# Altium PCB RFID_CC1101_433MHz.PcbDoc
Units mil, origin at the board's own origin, x right, y up, seen from the top; angles counter-clockwise.
Board outline 1889.76 x 2125.98 mil, 4 copper layers (Top Layer, GND Plane, POWER Plane, Bottom Layer), stack 16.312 mil thick; 74 components, 57 nets, 259 pads, 203 vias.
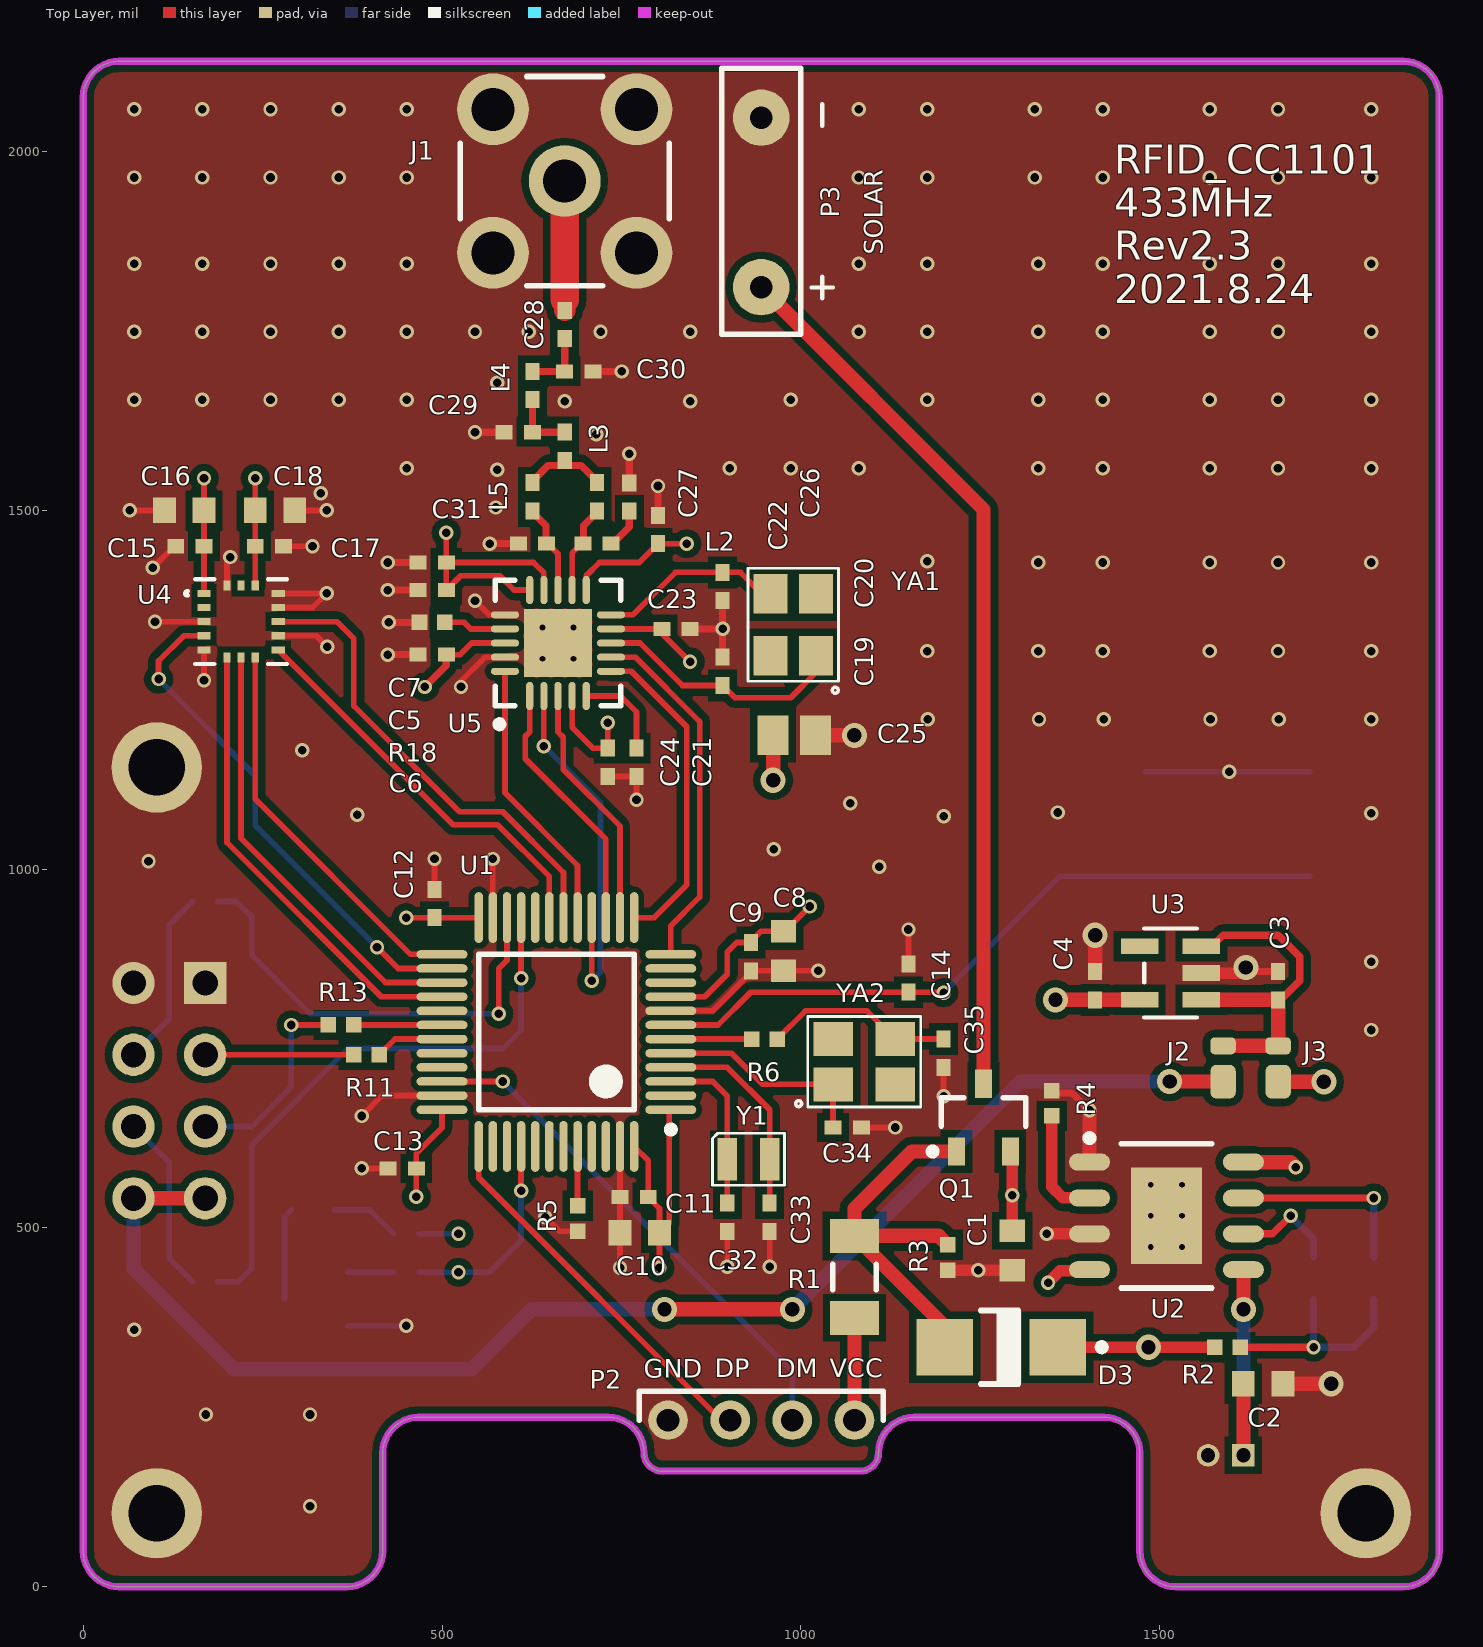
[diagram p0: Top Layer view]
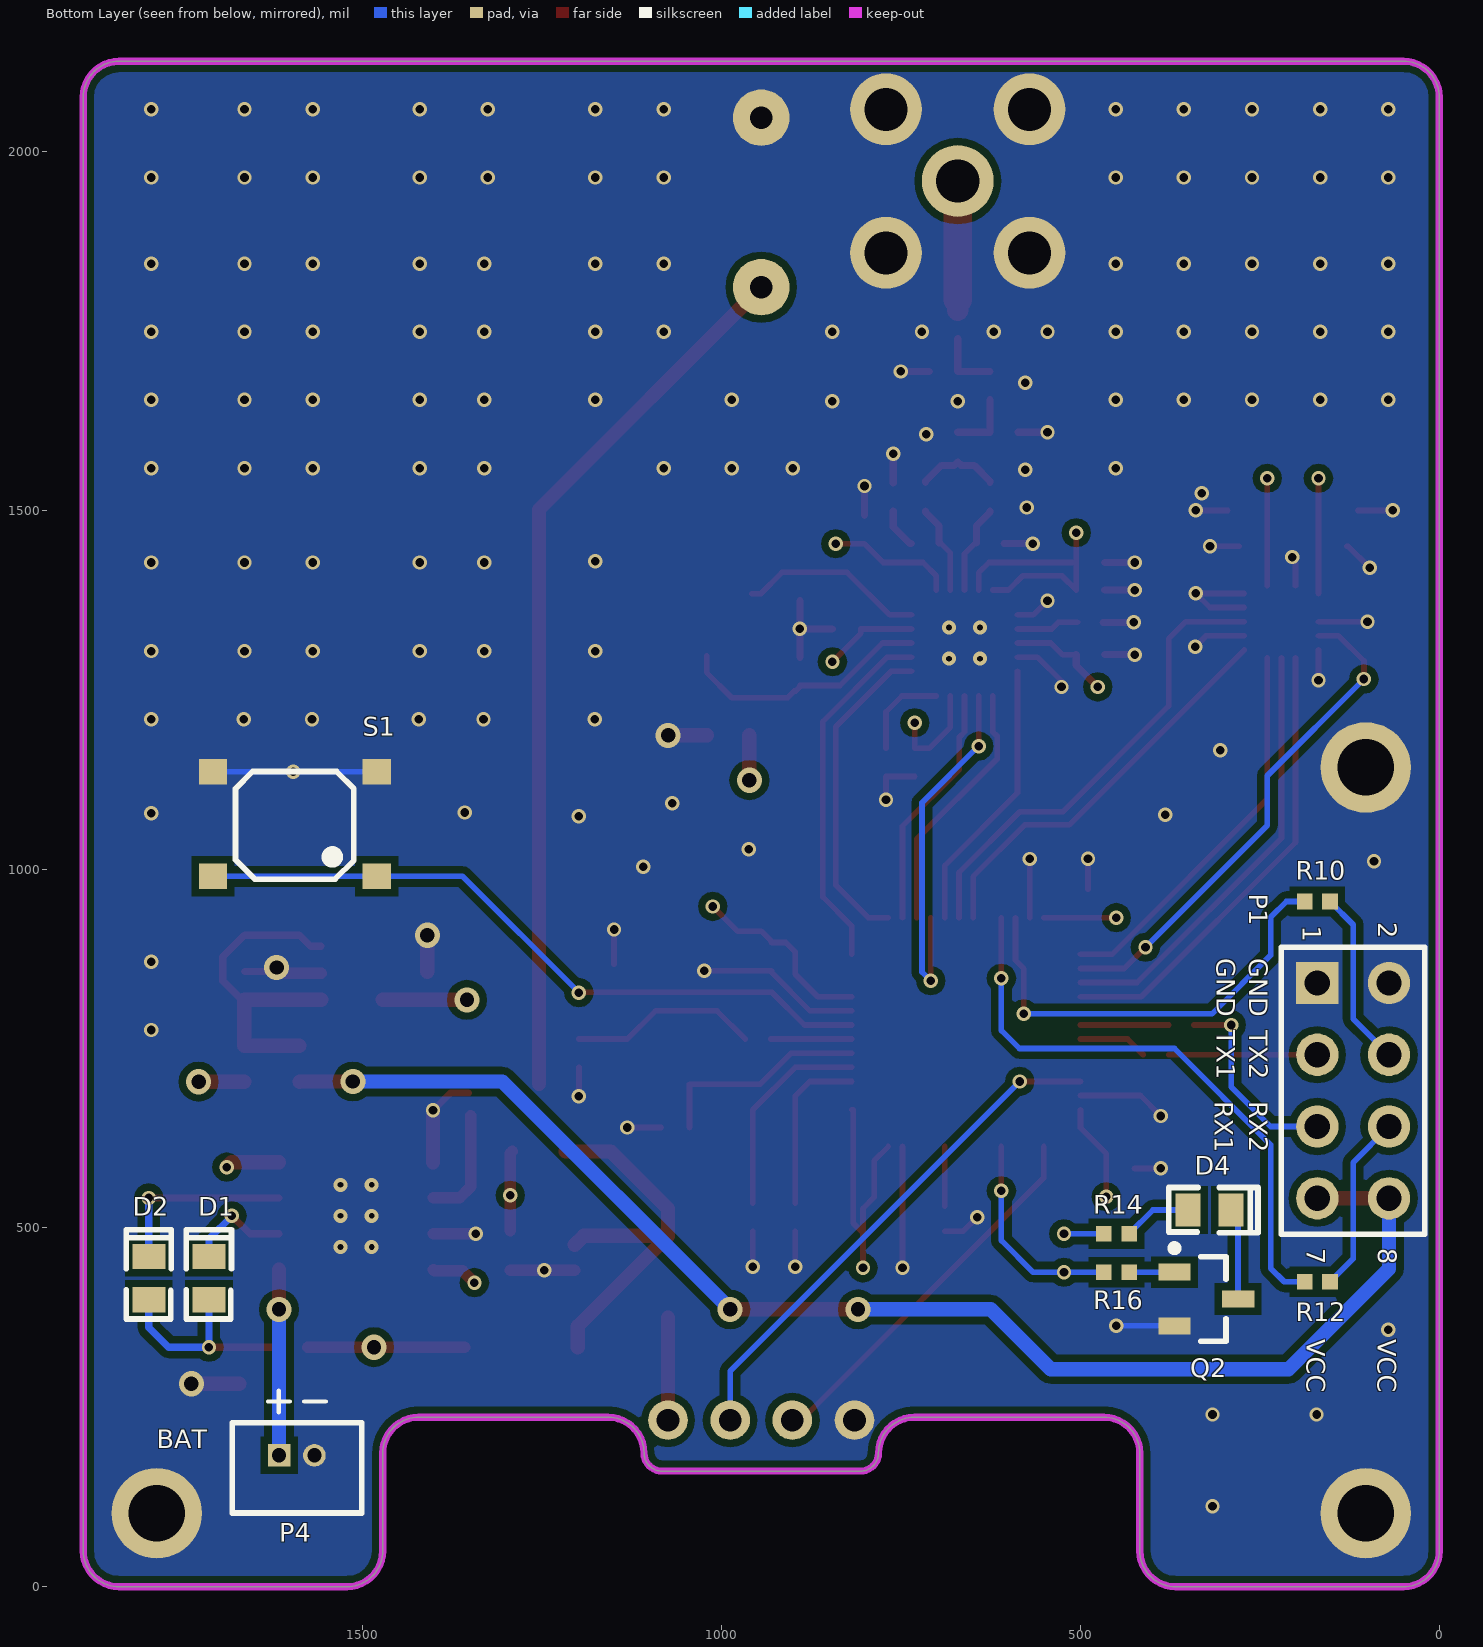
[diagram p1: Bottom Layer view, seen from below]
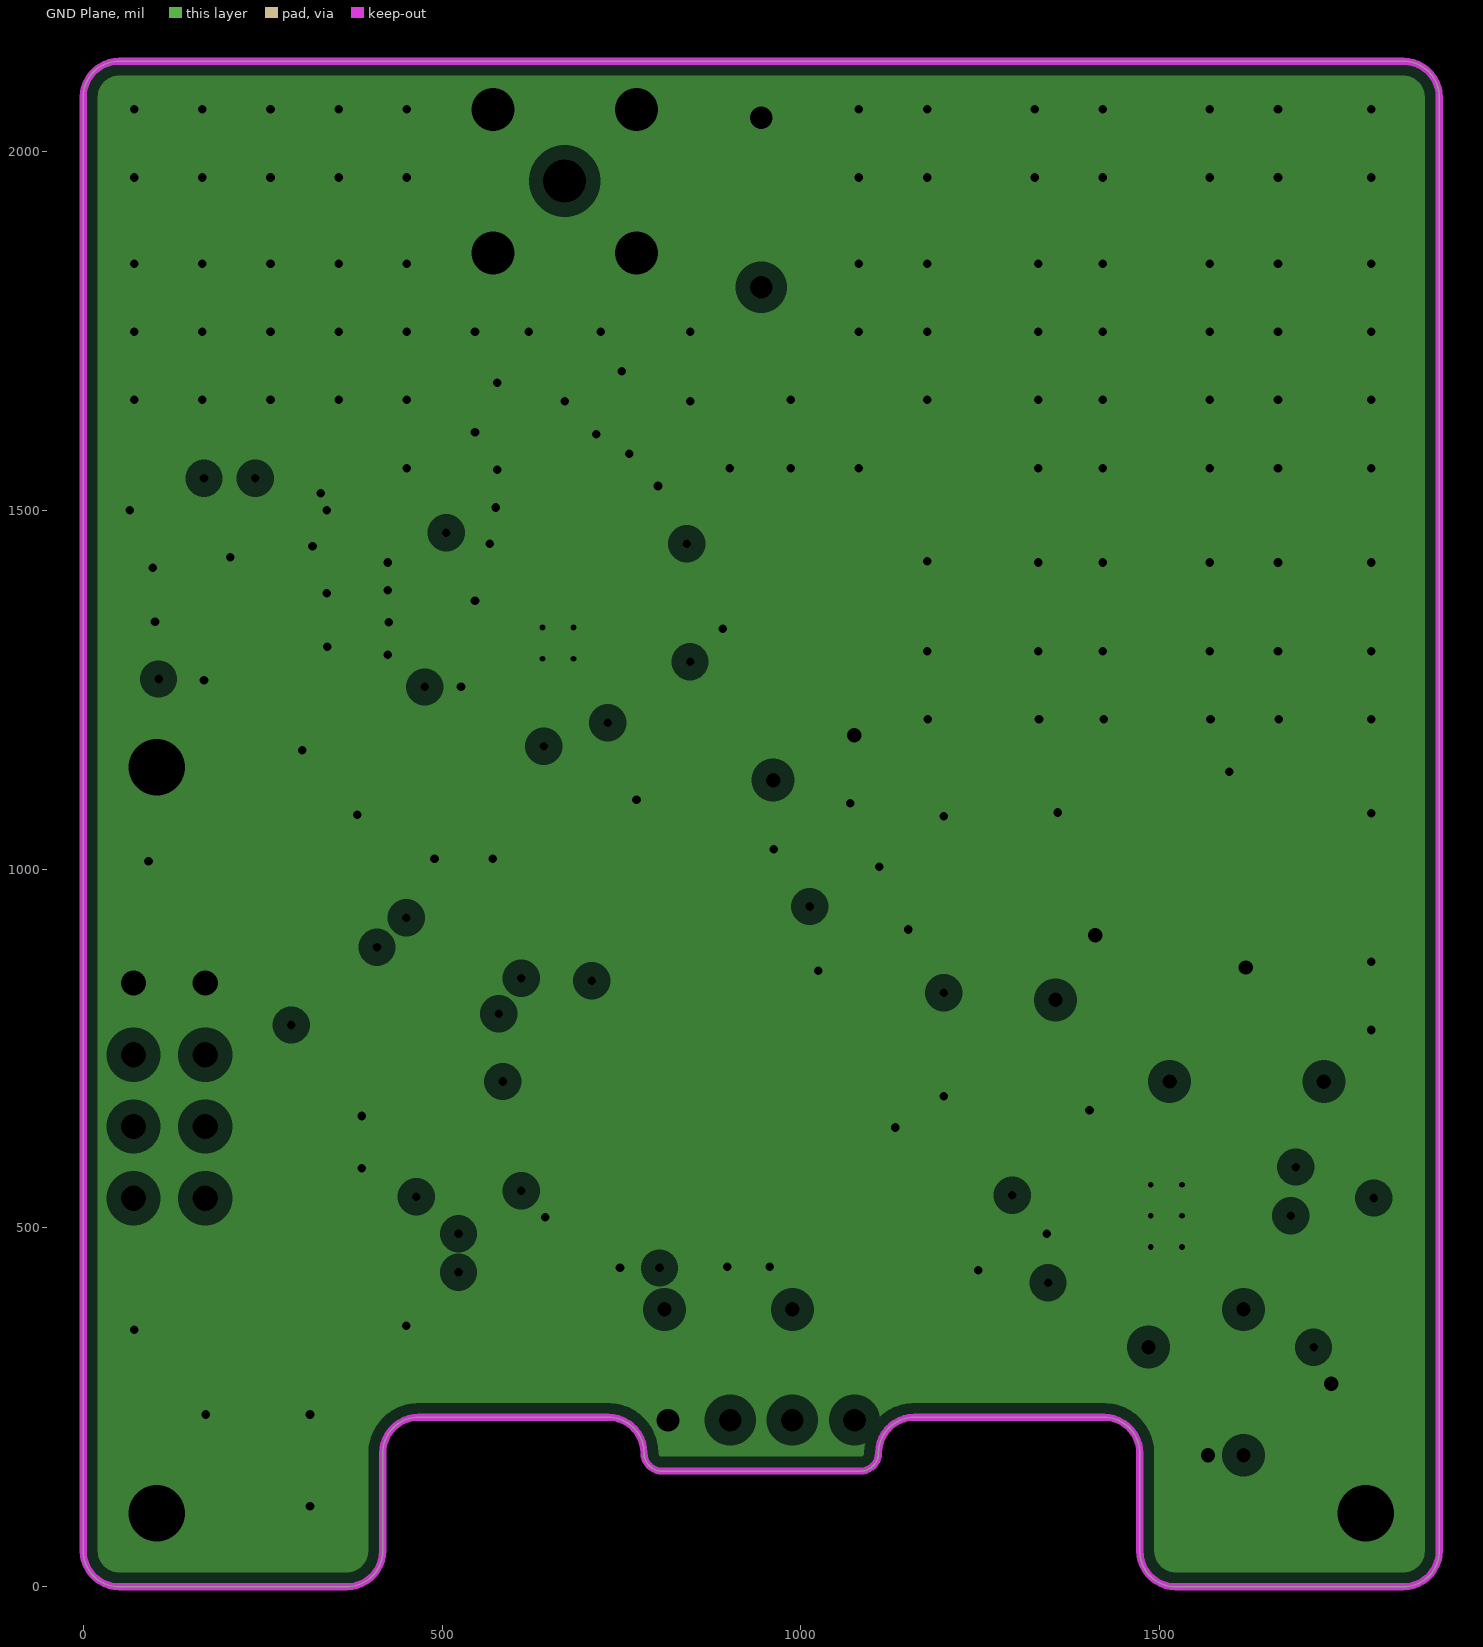
[diagram p2: GND Plane, clearances drawn from the general rule]
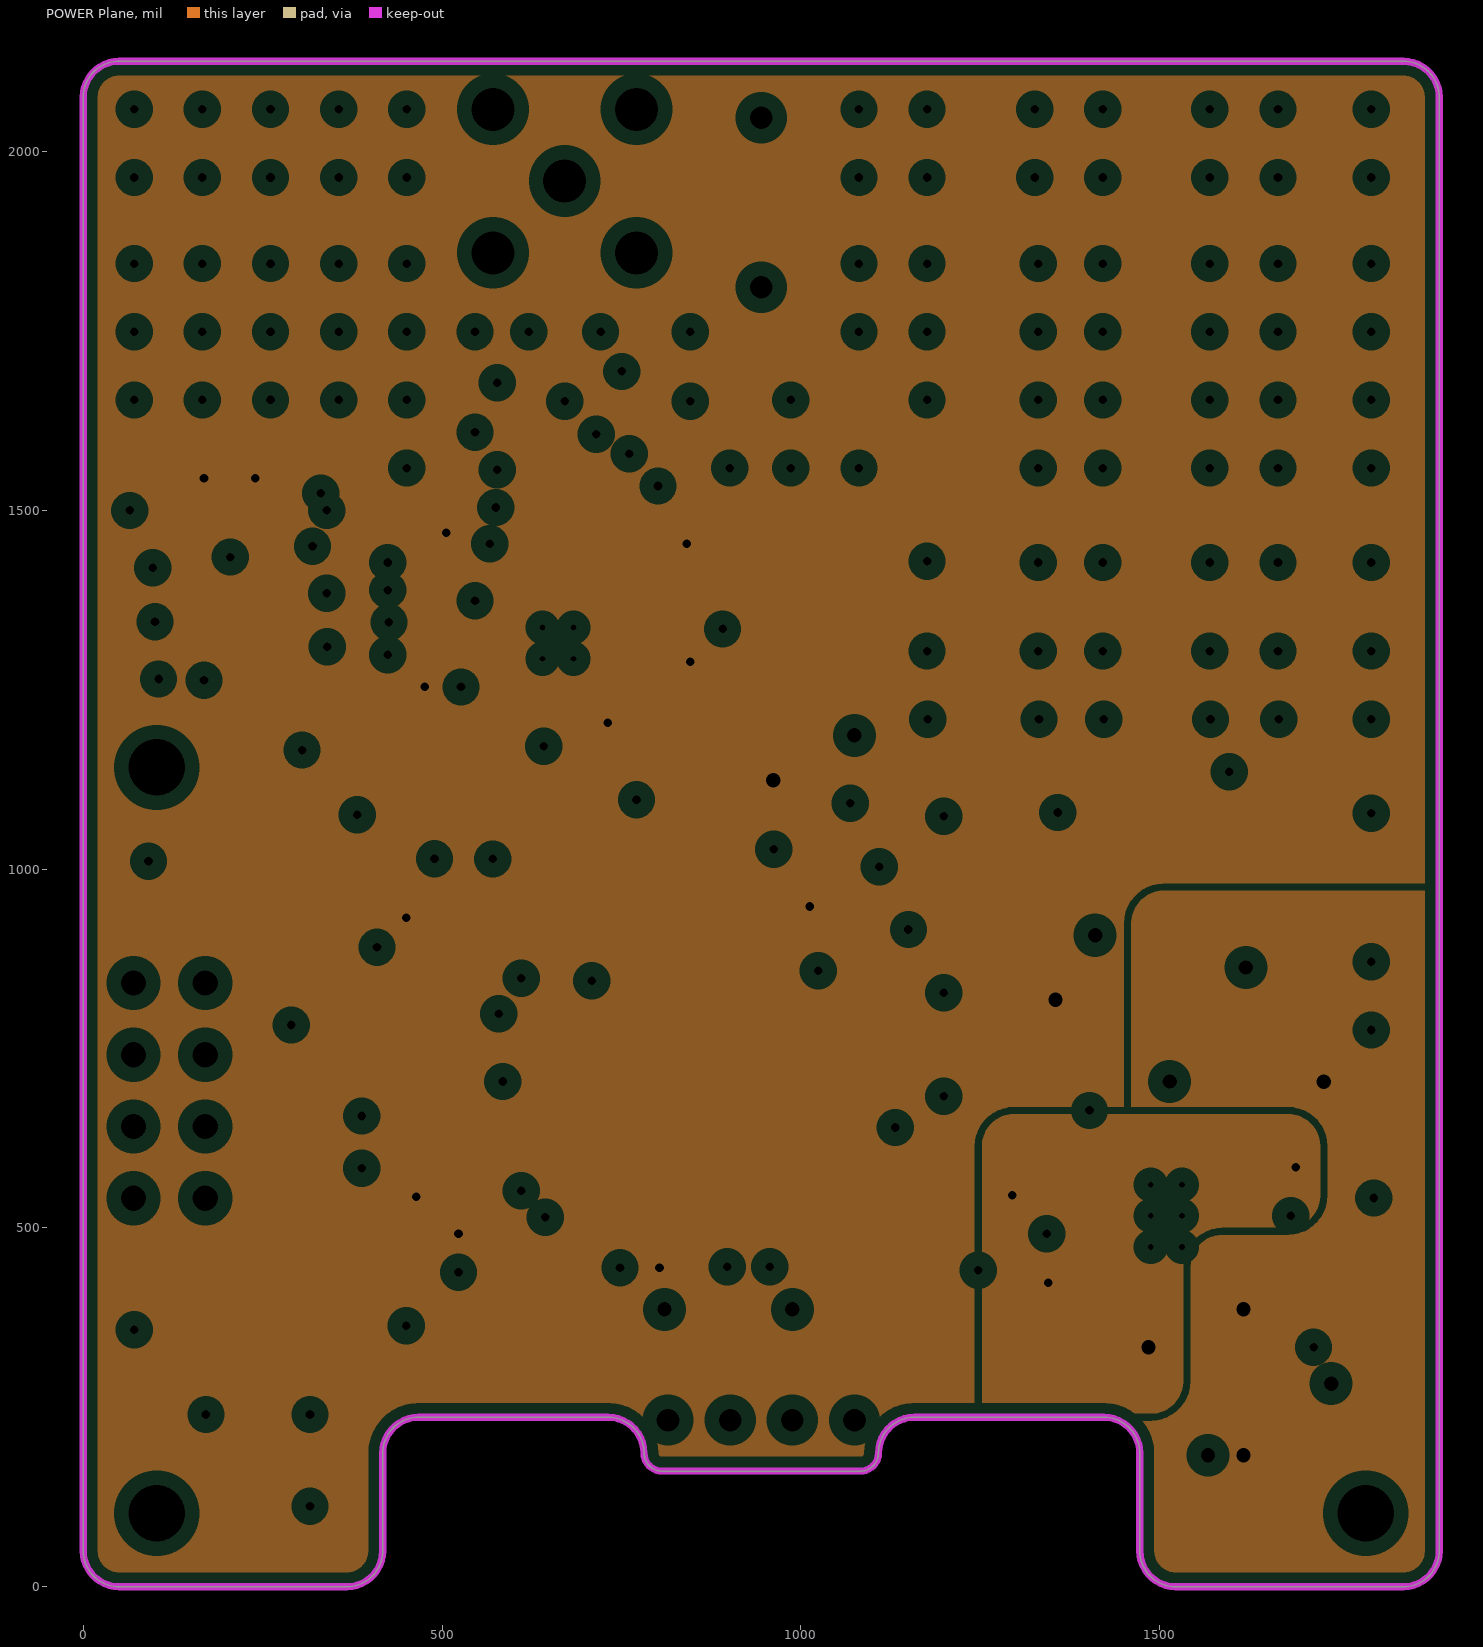
[diagram p3: POWER Plane, clearances drawn from the general rule]

## Layer stack, top to bottom
Top Solder: solder mask 0.4, Solder Resist, Dk 3.5
Top Layer: signal copper 1.3779
Dielectric 1: core 4, Core-009, Dk 4.5
GND Plane: plane copper 1.3779, net GND
Dielectric 3: prepreg 2.8, PP-006, Dk 4.1
POWER Plane: plane copper 1.3779, net (Multiple Nets)
Dielectric 2: core 4, Core-009, Dk 4.5
Bottom Layer: signal copper 1.3779
Bottom Solder: solder mask 0.4, Solder Resist, Dk 3.5

## Board outline
0,50 ccw(c50,50) 50,0 367.32,0 ccw(c367.32,50) 417.32,50 417.32,186.22 cw(c467.32,186.22) 467.32,236.22 731.5,236.22 cw(c731.5,186.22) 781.5,186.22 ccw(c806.5,186.22) 806.5,161.22 1083.27,161.22 ccw(c1083.27,186.22) 1108.27,186.22 cw(c1158.27,186.22) 1158.27,236.22 1422.44,236.22 cw(c1422.44,186.22) 1472.44,186.22 1472.44,50 ccw(c1522.44,50) 1522.44,0 1839.76,0 ccw(c1839.76,50) 1889.76,50 1889.76,2075.87 ccw(c1839.88,2075.98) 1840,2125.87 1840,2125.98 50,2125.98 ccw(c50,2075.98) 0,2075.98

## Design rules (kind name [scope] priority, off if disabled: settings)
Clearance Clearance_8mil [(IsPad and InComponent('U1')) or (IsPad and InComponent('U4')) or (IsPad and InComponent('U5')) or (IsPad and InComponent('USB1'))] p1: gap=8 ignorepadtopadclearanceinfootprint=TRUE
Clearance [All] p2: gap=10 ignorepadtopadclearanceinfootprint=FALSE except(0: Arc-Hole Track-Hole SMDPad-Hole THPad-Hole Via-Hole Fill-Hole Poly-Hole Region-Hole Text-Hole)
MinimumSolderMaskSliver [All] p1: minsoldermaskwidth=1.4
PlaneClearance [All] p1: clearance=20
PlaneConnect [All] p1: planeconnectstyle=Direct reliefexpansion=20 reliefentries=4 reliefconductorwidth=10 reliefairgap=10
PolygonConnect [All] p1: connectstyle=Direct reliefconductorwidth=10 reliefentries=4 polygonreliefangle="90 Angle" airgapwidth=10
RoutingVias [All] p1: holewidth=12 width=20 viastyle="Through Hole" minholewidth=6 minwidth=16 maxholewidth=28 maxwidth=50
SilkToSilkClearance [All] p1: silktosilkclearance=6
SilkToSolderMaskClearance [IsPad] p1: minsilkscreentomaskgap=0 clearancetoexposedcopper=TRUE
SolderMaskExpansion [All] p1: expansion=4
Width Width_PW [InNet('BAT+') or InNet('SOLAR+') or InNet('VCC') or InNet('VCC_3V') or InNet('VCC_5V')] p1: maxlimit=40 minlimit=8 preferedwidth=20
Width [All] p2: maxlimit=40 minlimit=8 preferedwidth=10
25 further rules are at their usual default settings.

## Classes and differential pairs
component class Power: C1 C2 C3 C4 D1 D2 D3 J2 J3 P3 P4 Q1 R1 R2 R3 R4 U2 U3
component class MEMS&RF: C5 C6 C7 C15 C16 C17 C18 C19 C20 C21 C22 C23 C24 C25 C26 C27 C28 C29 C30 C31 J1 L2 L3 L4 L5 R18 U4 U5 YA1
component class MCU: C8 C9 C10 C11 C12 C13 C14 C32 C33 D4 P1 Q2 R5 R10 R11 R12 R13 R14 R16 S1 U1 Y1

## Components (designator, comment, footprint, x,y, rotation, side; value= is the part's Value field where it differs from the comment)
C1 "10uF" 1608[0603] 1294.58,468.73 r90 top
C2 "10uF" 1608[0603] 1644.43,283 r180 top
C3 "1uF" 0402 1665.24,837.61 r270 top
C4 "1uF" 0402 1410.24,837.61 r270 top
C5 "220pF" 0402 486.32,1389 r180 top
C6 "220pF" 0402 486.31,1299 r0 top
C7 "10nF" 0402 486.31,1427.44 r0 top
C8 "1uF" 1608[0603] 975.85,885.94 r90 top
C9 "100nF" 0402 930.63,878.06 r90 top
C10 "10uF" 1608[0603] 775.59,493.06 r0 top
C11 "100nF" 0402 767.72,543.06 r180 top
C12 "100nF" 0402 489.45,952.2 r90 top
C13 "100nF" 0402 444.45,583.06 r180 top
C14 "100nF" 0402 1150,848.31 r90 top
C15 "100nF" 0402 148.64,1450 r0 top
C16 "1uF" 1608[0603] 140.77,1500 r180 top
C17 "100nF" 0402 259.38,1450 r0 top
C18 "1uF" 1608[0603] 267.25,1500 r180 top
C19 "12pF" 0402 891,1275.81 r270 top
C20 "15pF" 0402 891,1394 r90 top
C21 "100nF" 0402 771,1149 r90 top
C22 "220pF" 0402 801,1473.37 r90 top
C23 "10nF" 0402 826,1334.87 r180 top
C24 "100nF" 0402 731,1149 r270 top
C25 "1uF" C0805 990.98,1186.56 r180 top
C26 "220pF" 0402 761,1518.68 r90 top
C27 "3.9pF" 0402 716,1519 r90 top
C28 "220pF" 0402 671,1759 r90 top
C29 "8.2pF" 0402 606.31,1609 r0 top
C30 "5.6pF" 0402 690.68,1693.69 r180 top
C31 "3.9pF" 0402 626,1453.68 r0 top
C32 "10pF" 0402 897.59,514.99 r90 top
C33 "10pF" 0402 956.64,514.99 r90 top
C34 "18pF" 0402 1064.69,640 r180 top
C35 "18pF" 0402 1199,743.54 r90 top
D1 "Green" 0603/K 1714.58,400 r90 bottom
D2 "Red" 0603/K 1798.45,400 r90 bottom
D3 "SS24S" ONSC-SMA-2-403D-02_V 1279.58,333.85 r180 top
D4 "Green" 0603/K 350,525 r180 bottom
J1 "CONSMA002" CON-SMA-RA 671,1959 r0 top
J2 "0Ω" "1608[0603] - JUMPER" 1588.43,723.85 r90 top
J3 "0Ω" "1608[0603] - JUMPER" 1665.24,723.85 r90 top
L2 "27nH" 0402 716,1453.69 r0 top
L3 "22nH" 0402 671,1589.32 r90 top
L4 "27nH" 0402 626,1674 r90 top
L5 "27nH" 0402 626,1519 r90 top
P1 "15446808" HDR2X4-15446808 170,841.41 r270 bottom
P2 "LBX0062A" LBX0062A 1074.8,232.28 r180 top
P3 "SOLAR-PAD" SOLAR-PAD 944.88,1811.02 r90 top
P4 "A1251WV-XP-2P" A1251WV-XP-2P 1616.87,183.22 r180 bottom
Q1 "Si2301CDS" SOT95P237X112-3N 1254.58,653.85 r90 top
Q2 "MMS8050-L" SOT-23B_N 324.69,401 r180 bottom
R1 "0.4" RESC3216X07N 1074.8,431.85 r90 top
R2 "1k" RESC1005X04N 1594.58,333.85 r0 top
R3 "10k" RESC1005X04N 1204.58,458.89 r90 top
R4 "1.2k" RESC1005X04N 1349.58,673.85 r270 top
R5 "10k" RESC1005X04N 688.98,513.06 r270 top
R6 "390" RESC1005X04N 949.33,763.22 r180 top
R10 "33" RESC1005X04N 170,955 r180 bottom
R11 "33" RESC1005X04N 394.88,741.41 r180 top
R12 "33" RESC1005X04N 170,425 r180 bottom
R13 "33" RESC1005X04N 359.45,782.91 r0 top
R14 "10k" RESC1005X04N 450,491.85 r0 bottom
R16 "1k" RESC1005X04N 450,438.4 r180 bottom
R18 "56k" RESC1005X04N 486.31,1344 r0 top
S1 "DPST-4" DPST 1480.65,990.16 r0 bottom
U1 "STM32L051C8T6" STM-LQFP48_N 659.45,773.06 r180 top
U2 "TP4056" ESOP-9N 1509.58,516.85 r0 top
U3 "ADP151AUJZ-3.0-R7" UJ_5 1515.24,855.32 r180 top
U4 "ADXL362BCCZ" LGA_CC-16-4 220,1345 r0 top
U5 "CC1101" QFN50P400X400X100_HS-21N 661.63,1315.18 r90 top
Y1 "32.768k" XTAL-2012 897.59,595.81 r0 top
YA1 "26MHz" XTAL-SMT-4P 1021,1297.39 r90 top
YA2 "8M" XTAL-SMT-4P 1045,700.23 r0 top

## Footprints (in the part's own frame and the unit in brackets; to place one, negate y for a bottom-side part, rotate by r counter-clockwise, add the part's x,y. Pads: shape width x height; smd on the part's side, far side on the other; paste and mask are expansions set on the pad)
0402 [mm] "Chip Capacitor, Body 1.0x0.5mm, IPC High Density"
  rect 0.6x0.5 smd: 1(-0.5,0) 2(0.5,0)
  body extent -0.55,-0.3 0.55,0.3, height 1.3
0603/K [mil]
  rect 35x46 smd: A(0,0) K(60,0)
  silkscreen extent -27,-31 97,31
1608[0603] [mm] "Chip Capacitor, Body 1.6x0.8mm, IPC High Density"
  rect 0.8x0.9 smd: 1(-0.7,0) 2(0.7,0)
  body extent -0.87,-0.48 0.87,0.48, height 1.3
"1608[0603] - JUMPER" [mm] "jumper, Body 1.6x0.8mm, IPC High Density"
  rrect50% 1.2x0.9 smd: 1(-0.508,0)
  rrect50% 0.6x0.9 smd: 2(0.762,0)
  body extent -0.87,-0.48 0.87,0.48, height 1.3
A1251WV-XP-2P [mm] "Connector; Header; 2 Position"
  rect 0.8x0.8 hole 0.5: 1(0,0)
  round 0.8 hole 0.5: 2(1.25,0)
  silkscreen extent -1.66,-2.05 2.93,2.29
C0805 [mm] "Chip Capacitor, Body 2.0x1.3mm, IPC High Density"
  rect 1.1x1.4 smd: 1(-0.75,0) 2(0.75,0)
  body extent -1.1,-0.72 1.1,0.72, height 1.4
CON-SMA-RA [mil] "Connector, SMA Female, 5-Lead, Thru-Hole, Right-Angle, Body 7x7mm"
  round 100 hole 60: 1(0,0) 2(-100,100) 3(100,100) 4(100,-100) 5(-100,-100)
  silkscreen extent -146,-146 146,146
DPST [mm]
  rect 1x0.9 smd: 1(0,0) 2(5.8,0) 3(0,-3.7) 4(5.8,-3.7)
  silkscreen extent 0.81,-3.71 5,0.1
ESOP-9N [mm] "ESOP, 8-Leads, Body 4.90x3.90mm, Pitch 1.27mm, Thermal Pad 3.41x2.52mm, IPC Medium Density, For TP4056"
  oval 1.45x0.6 smd: 1(-2.725,1.905) 2(-2.725,0.635) 3(-2.725,-0.635) 4(-2.725,-1.905) 5(2.725,-1.905) 6(2.725,-0.635) 7(2.725,0.635) 8(2.725,1.905)
  rect 2.52x3.41 smd: 9(0,0)
  silkscreen extent -2.85,-2.55 1.6,2.88, body extent -3,-2.55 3,2.55, height 1.75
HDR2X4-15446808 [mm] "Connector; Header; 4x2 Position"
  rect 1.5x1.5 hole 0.9: 1(0,0)
  round 1.5 hole 0.9: 2(0,2.54) 3(2.54,0) 4(2.54,2.54) 5(5.08,0) 6(5.08,2.54) 7(7.62,0) 8(7.62,2.54)
  silkscreen extent -1.27,-1.27 8.89,3.81
LBX0062A [mm] "PogoPin; Connector; 4 Position"
  round 1.4 hole 0.8: 1(0,0) 2(2.2,0) 3(4.4,0) 4(6.6,0)
  silkscreen extent -1.02,-1.02 7.62,0
LGA_CC-16-4 [mm]
  rect 0.475x0.25 smd: 1(-1.313,1) 2(-1.313,0.5) 3(-1.313,0) 4(-1.313,-0.5) 5(-1.313,-1) 9(1.313,-1) 10(1.313,-0.5) 11(1.313,0) 12(1.313,0.5) 13(1.313,1)
  rect 0.25x0.35 smd: 6(-0.5,-1.275) 7(0,-1.275) 8(0.5,-1.275) 14(0.5,1.275) 15(0,1.275) 16(-0.5,1.275)
  silkscreen extent -1.98,-1.5 1.63,1.5, body extent 0,0 0.25,0.25, height 0.25
ONSC-SMA-2-403D-02_V [mm] "Molded, 2-Leads, Body 4.57x2.92mm"
  rect 2x2 smd: 1(-2,0) 2(2,0)
  silkscreen extent -3.67,-1.3 0.74,1.3, body extent -2.16,-1.3 2.16,1.3, height 2.2
QFN50P400X400X100_HS-21N [mm] "QFN, 20-Leads, Body 4.00x4.00mm, Pitch 0.50mm, Thermal Pad 2.40x2.40mm, IPC Medium Density"
  oval 1x0.25 smd: 1(-1.875,1) 2(-1.875,0.5) 3(-1.875,0) 4(-1.875,-0.5) 5(-1.875,-1) 11(1.875,-1) 12(1.875,-0.5) 13(1.875,0) 14(1.875,0.5) 15(1.875,1)
  oval 0.25x1 smd: 6(-1,-1.875) 7(-0.5,-1.875) 8(0,-1.875) 9(0.5,-1.875) 10(1,-1.875) 16(1,1.875) 17(0.5,1.875) 18(0,1.875) 19(-0.5,1.875) 20(-1,1.875)
  rect 2.4x2.4 smd: 21(0,0)
  silkscreen extent -3,-2.22 2.22,2.22, body extent -2.08,-2.08 2.08,2.08, height 1
RESC1005X04N [mm] "Chip Resistor, 2-Leads, Body 1.00x0.50mm, IPC Medium Density"
  rect 0.55x0.55 smd: 1(-0.45,0) 2(0.45,0)
  body extent -0.53,-0.28 0.53,0.28, height 0.4
RESC3216X07N [mm] "Chip Resistor, 2-Leads, Body 3.20x1.60mm, IPC Medium Density"
  rect 1.2x1.75 smd: 1(-1.45,0) 2(1.45,0)
  silkscreen extent -0.45,-0.77 0.45,0.77, body extent -1.7,-0.87 1.7,0.87, height 0.65
SOLAR-PAD [mm] "Connector; Header; 2 Position"
  round 2 hole 0.8: 1(0,0) 2(6,0)
  silkscreen extent -1.66,-2.54 7.75,1.4
SOT95P237X112-3N [mm] "SOT23, 3-Leads, Body 2.92x2.37mm, Pitch 0.95mm, IPC Medium Density"
  rect 1x0.6 smd: 1(-1.2,0.95) 2(-1.2,-0.95) 3(1.2,0)
  silkscreen extent -1.32,-1.5 0.7,1.92, body extent -1.32,-1.52 1.32,1.52, height 1.12
SOT-23B_N [mm] "SOT23, 3-Leads, Body 2.9x1.3mm, Pitch 0.95mm, Lead Span 2.4mm, IPC Medium Density"
  rect 1.15x0.6 smd: B(-1.125,0.95) C(1.125,0) E(-1.125,-0.95)
  silkscreen extent -1.25,-1.5 0.7,1.92, body extent -0.7,-1.5 0.7,1.5, height 1.14
STM-LQFP48_N [mm] "QFP, 48-Leads, Body 7x7mm, Pitch 0.5mm, IPC Medium Density"
  oval 1.8x0.3 smd: 1(-4.05,2.75) 2(-4.05,2.25) 3(-4.05,1.75) 4(-4.05,1.25) 5(-4.05,0.75) 6(-4.05,0.25) 7(-4.05,-0.25) 8(-4.05,-0.75) 9(-4.05,-1.25) 10(-4.05,-1.75) 11(-4.05,-2.25) 12(-4.05,-2.75) 25(4.05,-2.75) 26(4.05,-2.25) 27(4.05,-1.75) 28(4.05,-1.25) 29(4.05,-0.75) 30(4.05,-0.25) 31(4.05,0.25) 32(4.05,0.75) 33(4.05,1.25) 34(4.05,1.75) 35(4.05,2.25) 36(4.05,2.75)
  oval 0.3x1.8 smd: 13(-2.75,-4.05) 14(-2.25,-4.05) 15(-1.75,-4.05) 16(-1.25,-4.05) 17(-0.75,-4.05) 18(-0.25,-4.05) 19(0.25,-4.05) 20(0.75,-4.05) 21(1.25,-4.05) 22(1.75,-4.05) 23(2.25,-4.05) 24(2.75,-4.05) 37(2.75,4.05) 38(2.25,4.05) 39(1.75,4.05) 40(1.25,4.05) 41(0.75,4.05) 42(0.25,4.05) 43(-0.25,4.05) 44(-0.75,4.05) 45(-1.25,4.05) 46(-1.75,4.05) 47(-2.25,4.05) 48(-2.75,4.05)
  silkscreen extent -4.18,-2.75 2.75,3.57, body extent -3.5,-3.5 3.5,3.5, height 1.6
UJ_5 [mil] "5P,TSOT for ADP151AUJZ"
  rect 52x22 smd paste+0 mask+0: 1(-43,37.4) 2(-43,0) 3(-43,-37.4) 4(43,-37.4) 5(43,37.4)
  silkscreen extent -37,-62 37,62, body extent -55,-57 55,57, height 39
XTAL-2012 [mm] "NX2012SA, 2 pins, 2.0mmx1.2mm."
  rect 0.7x1.5 smd: 1(0,0) 2(1.5,0)
  silkscreen extent -0.53,-0.92 2.03,0.92
XTAL-SMT-4P [mm] "3225, 3.2mmx2.5mm"
  rect 1.4x1.2 smd: 1(0,0) 2(2.2,0) 3(2.2,1.6) 4(0,1.6)
  silkscreen extent -1.32,-0.8 3.1,2.4

## Part data
C1 C2 C10: library part C1608X5R1A106K080AC, "Capacitor (0603,X5R,10uF,DC 10V,±10%) TDK", LatestRevisionDate=29-May-2009, LatestRevisionNote="IPC-7351 Footprint Added.", PackageDescription="Chip Capacitor", PackageReference=C0603, Published=8-Jun-2000, Publisher="Altium Limited"
C3 C4: library part C1005X5R1E105K050BC, "Capacitor (0402,X5R,1uF,DC 25V,±10%) TDK", LatestRevisionDate=29-May-2009, LatestRevisionNote="IPC-7351 Footprint Added.", PackageDescription="Chip Capacitor", PackageReference=C0402, Published=8-Jun-2000, Publisher="Altium Limited"
C5 C6 C22 C26 C28: library part GRM1555C1H221JA01D, "Capacitor (0402,NP0,220pF,DC 50V,±5%) Murata", LatestRevisionDate=29-May-2009, LatestRevisionNote="IPC-7351 Footprint Added.", PackageDescription="Chip Capacitor", PackageReference=C0402, Published=8-Jun-2000, Publisher="Altium Limited"
C7 C23: library part GRM155R71E103KA01D, "Capacitor (0402,X7R,10nF,DC 25V,±10%) Murata", LatestRevisionDate=29-May-2009, LatestRevisionNote="IPC-7351 Footprint Added.", PackageDescription="Chip Capacitor", PackageReference=C0402, Published=8-Jun-2000, Publisher="Altium Limited"
C8 C16 C18: library part CGA3E2X5R1A105K080AA, "Capacitor (0603,X5R,1uF,DC 10V,+/-10%) TDK", LatestRevisionDate=29-May-2009, LatestRevisionNote="IPC-7351 Footprint Added.", PackageDescription="Chip Capacitor", PackageReference=C0603, Published=8-Jun-2000, Publisher="Altium Limited"
C9 C11 C12 C13 C14: library part CGA2B2X5R1A104K050BA, "Capacitor (0402,X5R,100nF,DC 10V,±10%) TDK", LatestRevisionDate=29-May-2009, LatestRevisionNote="IPC-7351 Footprint Added.", PackageDescription="Chip Capacitor", PackageReference=C0402, Published=8-Jun-2000, Publisher="Altium Limited"
C15 C17: library part C1005X7R1H104K050BE, "Capacitor (0402,X7R,100nF,DC 50V,±10%) TDK", LatestRevisionDate=29-May-2009, LatestRevisionNote="IPC-7351 Footprint Added.", PackageDescription="Chip Capacitor", PackageReference=C0402, Published=8-Jun-2000, Publisher="Altium Limited"
C19: library part GRM1555C1H120JZ01D, "Capacitor (0402,NP0,12pF,DC 50V,±5%) Murata", LatestRevisionDate=29-May-2009, LatestRevisionNote="IPC-7351 Footprint Added.", PackageDescription="Chip Capacitor", PackageReference=C0402, Published=8-Jun-2000, Publisher="Altium Limited"
C20: library part GRM1555C1H150JZ01D, "Capacitor (0402,NP0,15pF,DC 50V,±5%) Murata", LatestRevisionDate=29-May-2009, LatestRevisionNote="IPC-7351 Footprint Added.", PackageDescription="Chip Capacitor", PackageReference=C0402, Published=8-Jun-2000, Publisher="Altium Limited"
C21 C24: library part GRM155R71A104KA01D, "Capacitor (0402,X5R,100nF,DC 10V,±10%) Murata", LatestRevisionDate=29-May-2009, LatestRevisionNote="IPC-7351 Footprint Added.", PackageDescription="Chip Capacitor", PackageReference=C0402, Published=8-Jun-2000, Publisher="Altium Limited"
C25: library part GRM21BR71C105KA01L, "Capacitor (0805,X7R,1uF,DC 16V,±10%) Murata", LatestRevisionDate=29-May-2009, LatestRevisionNote="IPC-7351 Footprint Added.", PackageDescription="Chip Capacitor", PackageReference=C0805, Published=8-Jun-2000, Publisher="Altium Limited"
C27 C31: library part GRM1555C1H3R9CZ01D, "Capacitor (0402,NP0,3.9pF,DC 50V,±0.25pF) Murata", LatestRevisionDate=29-May-2009, LatestRevisionNote="IPC-7351 Footprint Added.", PackageDescription="Chip Capacitor", PackageReference=C0402, Published=8-Jun-2000, Publisher="Altium Limited"
C29: library part GRM1555C1H8R2CZ01D, "Capacitor (0402,NP0,8.2pF,DC 50V,±0.25pF) Murata", LatestRevisionDate=29-May-2009, LatestRevisionNote="IPC-7351 Footprint Added.", PackageDescription="Chip Capacitor", PackageReference=C0402, Published=8-Jun-2000, Publisher="Altium Limited"
C30: library part GRM1555C1H5R6CZ01D, "Capacitor (0402,NP0,5.6pF,DC 50V,±0.25pF) Murata", LatestRevisionDate=29-May-2009, LatestRevisionNote="IPC-7351 Footprint Added.", PackageDescription="Chip Capacitor", PackageReference=C0402, Published=8-Jun-2000, Publisher="Altium Limited"
C32 C33: library part CC0402DRNPO8BN100, "Capacitor (0402,NPO,10pF,DC 25V,±0.5pF) YAGEO", LatestRevisionDate=29-May-2009, LatestRevisionNote="IPC-7351 Footprint Added.", PackageDescription="Chip Capacitor", PackageReference=C0402, Published=8-Jun-2000, Publisher="Altium Limited"
C34 C35: library part CC0402GRNPO8BN180, "Capacitor (0402,NPO,18pF,DC 25V,±2%) YAGEO", LatestRevisionDate=29-May-2009, LatestRevisionNote="IPC-7351 Footprint Added.", PackageDescription="Chip Capacitor", PackageReference=C0402, Published=8-Jun-2000, Publisher="Altium Limited"
D1 D4: library part TLMG1100-GS08, "Standard 0603 SMD LED, Green, 2.1V,-40 °C to +100 °C", LatestRevisionDate=17-Jul-2002, LatestRevisionNote="Re-released for DXP Platform.", PackageDescription="SM LED; 2 Flat Leads", PackageReference=0603, PackageVersion=Feb-2002, Published=8-Jun-2000, Publisher="Altium Limited", Valid=Green
D2: library part TLMS1100-GS08, "Standard 0603 SMD LED, Red, 2.1V,-40 °C to +100 °C", LatestRevisionDate=17-Jul-2002, LatestRevisionNote="Re-released for DXP Platform.", PackageDescription="SM LED; 2 Flat Leads", PackageReference=0603, PackageVersion=Feb-2002, Published=8-Jun-2000, Publisher="Altium Limited", Valid=Red
D3: "Schottky Power Rectifier, 2-Pin SMA, VRRM=40V , VF=0.517V at IF=2.0A , Pb-Free, Tape and Reel", Manufacturer="On Semiconductor", Supplier Part Number 1=SS16T3GOSTR-ND, ComponentLink1Description="Manufacturer URL", ComponentLink1URL=http://www.onsemi.com/, ComponentLink2Description=Datasheet, ComponentLink2URL=http://www.onsemi.cn/pub_link/Collateral/SS16-D.PDF, ComponentLink3Description="Package Specification", ComponentLink3URL=http://www.onsemi.com/pub_link/Collateral/403D-02.PDF, Configuration=Single, DatasheetVersion="Rev. 7", IFSM Max (A)=40, Mounting Technology="Surface Mount", PackageDescription="2-Pin Small Molded Package, J-Bend Lead, Body 2.605 x 4.315 mm", PackageReference=SMA-2-403D-02, PackageVersion="Rev. G, 07/2012", Packing="Tape and Reel", PartNumber=SS24S, RoHS=TRUE, Supplier 1=Digi-Key, Supplier 2=Digi-Key, Supplier 3=Digi-Key, Supplier 4=Farnell, Supplier 5=Farnell, Supplier 6=Newark, Supplier 7=Newark, Supplier 8=Mouser, Supplier Part Number 2=SS16T3GOSCT-ND, Supplier Part Number 3=SS16T3GOSDKR-ND, Supplier Part Number 4=2317421, Supplier Part Number 5=1900107, Supplier Part Number 6=98H0976, Supplier Part Number 7=10N9613, Supplier Part Number 8=863-SS16T3G
J1: "SMA Female Right Angle PCB Mount Connector", ComponentLink1Description="Manufacturer URL", ComponentLink1URL=http://www.linxtechnologies.com/, ComponentLink2Description=Datasheet, ComponentLink2URL=http://www.connectorcity.com/diagrams/SMA/CONSMA002.pdf, DatasheetVersion="rev1.2, Aug-2008", PackageDescription="SMA Female Right Angle, PCB Mount Connector, Thru-Hole, 7 x 7 mm Body", PackageReference=CON-SMA-RA, PackageVersion="rev1.2, Aug-2008"
J2 J3: library part JUMP-0603, "jumper 0603(1608)", PackageDescription="Chip Resistor, 2-Leads, Body 1.60x0.80mm, IPC Medium Density", PackageReference=0603
L2 L4 L5: library part LQG15HS27NJ02D, "Inductor, 27n, 0402, ±5% / Murata", LatestRevisionDate=29-May-2009, LatestRevisionNote="IPC-7351 Footprint Added.", PackageDescription=Inductor, PackageReference=0402, Published=8-Jun-2000, Publisher="Altium Limited"
L3: library part LQG15HS22NJ02D, "Inductor, 22n, 0402, ±5% / Murata", LatestRevisionDate=29-May-2009, LatestRevisionNote="IPC-7351 Footprint Added.", PackageDescription=Inductor, PackageReference=0402, Published=8-Jun-2000, Publisher="Altium Limited"
P1: "Header, 4-Pin, Dual row, 2.54mm Pitch C-Grid Receptacle, Through Hole, Dual Row, High Profile, Vertical, High-Temperature, 8 Circuits", Manufacturer=molex, LatestRevisionDate=17-Jul-2002, LatestRevisionNote="Re-released for DXP Platform.", Publisher="Altium Limited"
P2: "PogoPinLBX0062A, 4-Pin", LatestRevisionDate=17-Jul-2002, LatestRevisionNote="Re-released for DXP Platform.", Publisher="Altium Limited"
P3 P4: "Header, 2-Pin", LatestRevisionDate=17-Jul-2002, LatestRevisionNote="Re-released for DXP Platform.", Publisher="Altium Limited"
Q1: "P-Channel MOSFET,VDS=-20V,VGS=8V,ID=3.1A,VGS(th)Min=0.4V,SOT-23", LatestRevisionDate=17-Jul-2002, LatestRevisionNote="Re-released for DXP Platform.", PackageDescription="SOT23, 3-Leads, Body 2.92x2.37mm, Pitch 0.95mm, IPC Medium Density", PackageReference=SOT23, PackageVersion=1995/1996, Published=8-Jun-2000, Publisher="Altium Limited"
Q2: "NPN Silicon  Plastic-Encapsulate  Transistor , MCC , Range:120-200", Code_JEDEC=TO-226-AA, LatestRevisionDate=17-Jul-2002, LatestRevisionNote="Re-released for DXP Platform.", PackageDescription="TO, Flat Index; 3 In-Line, Axial Leads; Body Dia. 4.8mm; Leads 0.55 x 0.51 mm (max)", PackageReference=TO-226-AA, Published=8-Jun-2000, Publisher="Altium Limited"
R1: library part PE1206FRF470R4L, "Resistor 1206(3216) 0.4Ω ±1% 1W AUTOMOTIVE GRADEPE_L series", PackageDescription="Chip Resistor, 2-Leads, Body 3.20x1.60mm, IPC Medium Density", PackageReference=1206
R2 R16: library part RC0402FR-071KL, "Resistor 0402(1005) 1kΩ ±1%", PackageDescription="Chip Resistor, 2-Leads, Body 1.00x0.50mm, IPC Medium Density", PackageReference=0402
R3 R5 R14: library part RC0402FR-0710KL, "Resistor 0402(1005) 10kΩ ±1%", PackageDescription="Chip Resistor, 2-Leads, Body 1.00x0.50mm, IPC Medium Density", PackageReference=0402
R4: library part RC0402FR-071K2L, "Resistor 0402(1005) 1.2kΩ ±1%", PackageDescription="Chip Resistor, 2-Leads, Body 1.00x0.50mm, IPC Medium Density", PackageReference=0402
R6: library part RC0402FR-07390RL, "Resistor 0402(1005) 390Ω ±1%", PackageDescription="Chip Resistor, 2-Leads, Body 1.00x0.50mm, IPC Medium Density", PackageReference=0402
R10 R11 R12 R13: library part RC0402FR-0733RL, "Resistor 0402(1005) 33Ω ±1%", PackageDescription="Chip Resistor, 2-Leads, Body 1.00x0.50mm, IPC Medium Density", PackageReference=0402
R18: library part RK73H1ETTP5602F, "Resistor, 56k ohms, 0402, ±1% Koa", PackageDescription="Chip Resistor, 2-Leads, Body 1.00x0.50mm, IPC Medium Density", PackageReference=0402
S1: library part CX-G001, "5.2*5.2轻触开关", LatestRevisionDate=17-Jul-2002, LatestRevisionNote="Re-released for DXP Platform.", PackageDescription="Switch; 4 Leads", PackageReference=DPST-4, Published=24-Mar-1999, Publisher="Altium Limited"
U1: "Access line ultra-low-power 32-bit MCU Arm?-based Cortex?-M0+, 64 KB Flash, 8 KB SRAM,2 KB EEPROM, 38 fast I/Os, 48-pin LQFP, -40 to 125 degC, Tray", I/Os (High Current)=37, Operating Frequency(F) (Processor speed) (MHz)=32, Supplier Part Number 1=497-11517-ND, Supply Voltage(Vcc) min (V)=2, A/D Converter=2x12-bit, ComponentLink1Description="Manufacturer URL", ComponentLink1URL=http://www.st.com/web/en/home.html, ComponentLink2Description=Datasheet, ComponentLink2URL=http://www.st.com/st-web-ui/static/active/en/resource/technical/document/datasheet/CD00161566.pdf, ComponentLink3Description="Package Specification", ComponentLink3URL=http://www.st.com/st-web-ui/static/active/en/resource/technical/document/datasheet/DM00058181.pdf, Core="ARM Cortex-M0+", DatasheetVersion="Rev. 16", FLASH Size (Prog) (kB)=64, Internal RAM Size (kB)=20, Mounting Technology="Surface Mount", PackageDescription="48-Pin Low Profile Quad Flat Package, 7 x 7 mm Body, 0.5 mm Pitch", PackageReference=LQFP48, PackageVersion="Rev. 6, 06/2013", Packing=Tray, PartNumber=STM32L051C8T6, Supplier 1=Digi-Key, Supplier 2=Farnell, Supplier 3=Newark, Supplier 4=Mouser, Supplier Part Number 2=1899017, Supplier Part Number 3=72T2644, Supplier Part Number 4=511-STM32L051C8T6
U2: "1A线性锂离子电池充电器"
U3: library part ADP151, "The ADP151 is an ultralow noise, low dropout (LDO) linear regulator that operates from 2.2 V to 5.5 V and provides up to 200 mA of output current.", Dropout Voltage(mV)=140, Iout(max)(mA)=200, Isupply(uA)=10, RMS Niose(uV)=9, Vin(V)=2.2-5.5, Vout(V)="1.1, 1.2, 1.5, 1.8, 2.1, 2.5, 2.6, 2.75, 2.8, 2.85, 3.0, 3.3"
U4: "ADXL362, LGA, CC-16-4."
U5: "Low-Power Sub-1GHz RF Transceiver"
Y1: library part NX2012SA-32.768K, "Crystal Oscillator, SMT-2012, 2 Pins, NX2012SA-32.768K.", LatestRevisionDate=17-Jul-2002, LatestRevisionNote="Re-released for DXP Platform.", PackageDescription="Crystal, Thru-Hole; 2 Leads; Body 3.1 x 8.2 mm (Dia.xH)", PackageReference=R38, Published=8-Jun-2000, Publisher="Altium Limited"
YA1: library part NX3225GA-26M, "Crystal, 26.000000MHz, 10.0pF, 50 ohms max, 20/40 ppm, -40C to +85C / , NDK", Valid=26MHz
YA2: library part DSX321G-8M, "3225 , 小型,薄型,軽量SMD水晶振動子", Valid=8M

## Free pads (board coordinates)
  round 125.98 hole 78.74: 6(102.36,102.36) 7(1787.4,102.36) 8(102.36,1141.73)

## Via types
v1: diameter 20, hole 12, Top Layer to Bottom Layer, tented both sides, 181 vias
v2: diameter 35, hole 20, Top Layer to Bottom Layer, tented both sides, 12 vias
v3: diameter 19.68, hole 7.87, Top Layer to Bottom Layer, tented both sides, 10 vias

## Nets (pads, with @x,y where several pads share a name; then routed paths per layer and width w, separated by ;. In a path a pad name is that pad's centre, name@x,y a point inside that pad or via, vN(x,y) a via of type N, cw(c..) or ccw(c..) an arc to the next point about the centre after c; other vN are vias at no path point)
BAT+: C2.2 J3.1 P4.1 U2.5 | length 422.2
  Top Layer w20: P4.1 C2.2 ; v2(1616.87,386.56) U2.5 ; J3.1 v2(1729,703.85)
  Bottom Layer w20: P4.1 v2(1616.87,386.56)
GDO0: U1.13 U5.6 | length 450.3
  Top Layer w8: U5.6 763.73,1275.81 841,1198.54 841,977.86 795.66,932.51 U1.13
GDO2: U1.14 U5.3 | length 344.6
  Top Layer w8: U5.3 661.63,1191.4 669.03,1184 669.03,1139 748.03,1060 U1.14
GND: C1.1 C2.1 C3.1 C4.1 C5.2 C6.1 C7.1 C8.1 C9.1 C10.1 C11.2 C12.2 C13.2 C14.2 C15.1 C16.2 C17.2 C18.1 C19.1 C20.1 C21.1 C22.2 C23.1 C24.2 C25.1 C26.2 C29.1 C30.1 C31.1 C32.1 C33.1 C34.1 C35.1 J1.2 J1.3 J1.4 J1.5 P1.1 P1.2 P2.4 P3.2 P4.2 pad.6 pad.7 pad.8 Q2.E R3.1 R4.1 R5.2 R18.1 S1.3 S1.4 U1.8 U1.23 U1.35 U1.47 U2.1 U2.3 U2.9 U3.2 U4.3 U4.5 U4.10 U4.12 U4.13 U4.16 U5.16 U5.19 U5.21 | length 3094.5
  Top Layer w8: v1(65,1500) C16.2 ; v1(96.99,1420) 126.99,1450 C15.1 ; v1(100,1345) U4.3 ; v1(168.33,1263.32) U4.5 ; U4.16 200.31,1427.06 205,1431.75 v1(205,1435) ; U4.10 324.69,1325.31 v1(340,1310) ; U4.12 319.69,1364.69 v1(339.38,1384.38) U4.13 ; C17.2 v1(319.53,1450) ; C18.1 v1(339.38,1500) ; v1(388,583.06) C13.2 ; v1(388,656.13) 416.35,684.48 U1.35 ; C12.2 v1(489.45,1014.45) ; v1(526.46,1254) 526.46,1262.13 559.82,1295.5 U5.19 ; v1(546,1374) 565.45,1354.55 U5.16 ; U1.23 v1(570.87,1014.31) ; v1(644,515) 663.65,495.35 R5.2 ; C24.2 C21.1 v1(771,1097) ; v1(748.03,444.48) C10.1 C11.2 U1.47 ; U1.8 876.81,802.59 930.63,856.41 C9.1 C8.1 v1(1024.13,858.38) ; v1(897.59,446.13) C32.1 ; v1(956.64,446.13) C33.1 ; C34.1 v1(1131.61,640) ; C14.2 v1(1150,916) ; v1(1199,683.75) C35.1
  Top Layer w10: v1(424.44,1299) C6.1 ; v1(424.44,1389) C5.2 ; v1(424.44,1427.44) C7.1 ; v1(426,1344) R18.1 ; v1(546,1609) C29.1 ; v1(566.31,1453.69) C31.1 ; C30.1 v1(750.68,1693.68) ; C26.2 v1(761,1579) ; C22.2 v1(801,1534) ; C23.1 v1(891,1334.87) ; C19.1 v1(891,1334.87) ; C20.1 v1(891,1334.87) ; R4.1@1353.12,688.03 1378.12,688.03 v1(1402.3,663.85) ; v2(1620.24,862.92) 1625.87,857.29 C3.1
  Top Layer w16: R3.1 v1(1247.26,441.17) C1.1 ; v1(1342.58,491.85) U2.3 ; U3.2 1607.5,855.32 1615.09,862.92 v2(1620.24,862.92)
  Top Layer w20: C25.1 v2(1074.72,1186.56) ; U2.1 v1(1402.3,663.85) ; C4.1 v2(1410.24,907.92) ; C2.1 v2(1739,283)
  Bottom Layer w8: Q2.E v1(450,363.6) ; S1.3 v1(1597,1135.83) S1.4
  other v1: 316,112 171,240 316,240 71,358 1795,775.85 1795,871 1109.27,1003.33 91,1011 962.45,1028 1199,1074 382,1076 1795,1078 1358,1079 1069,1092 305,1166 1177,1209 1332,1209 1422,1209 1571,1209 1666,1209 1795,1209 1176,1304 1331,1304 1421,1304 1570,1304 1665,1304 1795,1304 1331,1427.44 1421,1427.44 1570,1427.44 1665,1427.44 1795,1427.44 1176,1429 574.87,1504 331,1524 577.1,1556.69 451,1559 901,1559 986,1559 1081,1559 1331,1559 1421,1559 1570,1559 1665,1559 1795,1559 714.87,1606 670.87,1652 846,1652 71,1654 166,1654 261,1654 356,1654 451,1654 986,1654 1176,1654 1331,1654 1421,1654 1570,1654 1665,1654 1795,1654 577.1,1678 71,1749 166,1749 261,1749 356,1749 451,1749 546,1749 620.87,1749 720.95,1749 846,1749 1081,1749 1176,1749 1331,1749 1421,1749 1570,1749 1665,1749 1795,1749 71,1844 166,1844 261,1844 356,1844 451,1844 1081,1844 1176,1844 1331,1844 1421,1844 1570,1844 1665,1844 1795,1844 71,1964 166,1964 261,1964 356,1964 451,1964 1081,1964 1176,1964 1326,1964 1421,1964 1570,1964 1665,1964 1795,1964 71,2059 166,2059 261,2059 356,2059 451,2059 1081,2059 1176,2059 1326,2059 1421,2059 1570,2059 1665,2059 1795,2059
  other v3: 1487.93,473.54 1531.24,473.54 1487.93,516.85 1531.24,516.85 1487.93,560.15 1531.24,560.15 639.98,1293.53 683.28,1293.53 639.98,1336.83 683.28,1336.83
INT1: U1.18 U4.11 | length 660.4
  Top Layer w8: U4.11 353.44,1345 377.17,1321.27 377.17,1227.28 524.45,1080 584.76,1080 669.29,995.47 U1.18
INT2: U1.19 U4.9 | length 566
  Top Layer w8: U4.9 515.3,1062 577.31,1062 649.61,989.7 U1.19
LED_GREEN: R16.1 U1.40 | length 291.9
  Top Layer w8: v1(610.24,552) U1.40
  Bottom Layer w8: R16.1 v1(523,438.4) 566.12,438.4 610.24,482.52 v1(610.24,552)
LPUART1_RX: R10.1 U1.22 | length 626.2
  Top Layer w8: v1(579.13,798.38) 579.13,861.65 590.55,873.06 U1.22
  Bottom Layer w8: R10.1 213.06,955 235,933.06 235,880 316.62,798.38 v1(579.13,798.38)
LPUART1_TX: R12.1 U1.21 | length 825.6
  Top Layer w8: v1(610.24,848.06) U1.21
  Bottom Layer w8: R12.1 216.08,425 235,443.92 235,615.95 369.05,750 585,750 610.24,775.24 v1(610.24,848.06)
NetC3_2: C3.2 J2.2 J3.2 U3.1 U3.3 | length 478.1
  Top Layer w10: U3.3 1573.24,892.72 1588.43,907.92 1665.24,907.92 1695.24,877.92 1695.24,844.43 1668.73,817.92 C3.2
  Top Layer w20: U3.1 C3.2 J3.2 J2.2
NetC14_1: C14.1 S1.1 S1.2 U1.7 | length 976.5
  Top Layer w8: U1.7 884.57,782.91 930.3,828.63 C14.1 1198.37,828.63 v1(1199,828)
  Bottom Layer w8: v1(1199,828) 1361.16,990.16 S1.1 S1.2
NetC19_2: C19.2 U5.8 YA1.1 | length 356.1
  Top Layer w8: U5.8 775.88,1315.18 834.94,1256.13 C19.2 891,1254.16 896.84,1248.31 898.81,1248.31 908.13,1239 986,1239 1021,1274 YA1.1
NetC20_2: C20.2 U5.10 YA1.3 | length 259.3
  Top Layer w8: U5.10 766.15,1354.55 825.29,1413.69 C20.2 916,1413.69 945.69,1384 YA1.3
NetC21_2: C21.2 U5.5 | length 129.7
  Top Layer w8: U5.5 748.79,1241.36 771,1219.15 C21.2
NetC26_1: C26.1 L2.2 | length 57
  Top Layer w10: L2.2 737.65,1453.69 761,1477.03 C26.1
NetC27_1: C27.1 L2.1 U5.12 | length 125.8
  Top Layer w8: U5.12 681.31,1440.65 695.21,1454.55 L2.1@697.18,1454.55
  Top Layer w10: L2.1@697.18,1454.55 697.18,1478.53 716,1497.35 C27.1
NetC27_2: C27.2 L3.1 L5.2 | length 116.3
  Top Layer w10: L5.2 626,1540.65 648.17,1562.82 666.16,1562.82 671,1567.66 675.84,1562.82 693.83,1562.82 716,1540.65 C27.2
NetC28_1: C28.1 C30.2 L4.2 | length 90.6
  Top Layer w10: L4.2 C30.2 C28.1
NetC28_2: C28.2 J1.1 | length 180.3
  Top Layer w30: C28.2 671,1794
  Top Layer w40: 671,1794 J1.1
NetC29_2: C29.2 L3.2 L4.1 | length 90.3
  Top Layer w10: L4.1 C29.2 L3.2
NetC31_2: C31.2 L5.1 U5.13 | length 126.2
  Top Layer w8: C31.2@644.82,1454.55 646.79,1454.55 661.63,1439.71 U5.13
  Top Layer w10: L5.1 626,1497.35 644.82,1478.53 C31.2@644.82,1454.55
NetC32_2: C32.2 U1.3 Y1.1 | length 236.2
  Top Layer w8: U1.3 877.17,704.17 897.59,683.75 Y1.1 C32.2
NetC33_2: C33.2 U1.4 Y1.2 | length 292.3
  Top Layer w8: U1.4 897.59,723.85 956.64,664.8 Y1.2 C33.2
NetC34_2: C34.2 U1.5 YA2.1 | length 304.3
  Top Layer w8: U1.5 903.36,743.54 946.66,700.23 YA2.1 C34.2
NetC35_2: C35.2 R6.1 YA2.3 | length 264.6
  Top Layer w8: R6.1 1006.42,802.59 1092.24,802.59 YA2.3 C35.2
NetD1_A: D1.A D2.A R2.2 | length 302.3
  Top Layer w10: R2.2 v1(1714.58,333.85)
  Bottom Layer w10: D1.A v1(1714.58,333.85) 1770.85,333.85 1798.45,361.45 D2.A
NetD1_K: D1.K U2.6 | length 146.2
  Top Layer w10: U2.6 1657.26,491.85 1682.26,516.85 v1(1682.61,516.85)
  Bottom Layer w10: v1(1682.61,516.85) 1714.58,484.87 D1.K
NetD2_K: D2.K U2.7 | length 263.4
  Top Layer w10: U2.7 v1(1798.45,541.85)
  Bottom Layer w10: D2.K v1(1798.45,541.85)
NetD3_2: D3.2 Q1.1 R1.2 R3.2 | length 555.5
  Top Layer w20: D3.2 1200.84,362.82 R1.2 R1.2 ; R3.2 1192.25,488.93 R1.2 ; Q1.1 1154.6,606.6 1074.8,526.8 R1.2
NetD4_A: D4.A R14.1 | length 96
  Bottom Layer w8: D4.A 399.13,525 R14.1
NetD4_K: D4.K Q2.C | length 128
  Bottom Layer w8: Q2.C 280.4,515.4 D4.K
NetP1_3: P1.3 R11.2 | length 207.2
  Top Layer w8: P1.3 R11.2
NetP1_4: P1.4 R10.2 | length 247.7
  Bottom Layer w8: P1.4 120,791.41 120,922.72 R10.2
NetP1_5: P1.5 R13.1 | length 281
  Top Layer w8: v1(290,782.91) R13.1
  Bottom Layer w8: P1.5 235,641.41 290,696.41 v1(290,782.91)
NetP1_6: P1.6 R12.2 | length 250.5
  Bottom Layer w8: P1.6 120,591.41 120,457.28 R12.2
NetP2_1: P2.1 R1.1 | length 142.5
  Top Layer w20: P2.1 R1.1
NetQ2_B: Q2.B R16.2 | length 63.3
  Bottom Layer w8: Q2.B R16.2
NetR4_2: R4.2 U2.2 | length 157.8
  Top Layer w16: R4.2 1349.58,557.59 1365.32,541.85 U2.2
NetR5_1: R5.1 U1.44 | length 82.8
  Top Layer w8: R5.1 U1.44
NetR6_2: R6.2 U1.6 | length 112.7
  Top Layer w8: U1.6 R6.2
NetR18_2: R18.2 U5.17 | length 87.6
  Top Layer w8: R18.2 531,1344 540.13,1334.87 U5.17
SOLAR+: P3.1 Q1.3 | length 1238.2
  Top Layer w20: P3.1 1254.58,1501.32 Q1.3
SPI1_CS: U1.12 U5.7 | length 501.9
  Top Layer w8: U5.7 769.5,1295.5 859,1206 859,961.06 818.9,920.96 U1.12
SPI1_MISO: U1.16 U5.2 | length 522.8
  Top Layer w8: v1@641.94,1171.56 U5.2 ; v1(708.66,844.43) U1.16
  Bottom Layer w8: v1(641.95,1171.56) 720.95,1092.56 720.95,856.71 v1(708.66,844.43)
SPI1_MOSI: U1.17 U5.20 | length 385.2
  Top Layer w8: U5.20 587.81,1106.48 688.98,1005.31 U1.17
SPI1_SCLK: U1.15 U5.1 | length 358
  Top Layer w8: U5.1 622.26,1191.4 616,1185.14 616,1154 728.35,1041.65 U1.15
SPI2_CS: U1.25 U4.8 | length 547
  Top Layer w8: U4.8 239.69,1097.68 456.04,881.33 U1.25
SPI2_MISO: U1.27 U4.7 | length 615
  Top Layer w8: U4.7 220,1043.06 421.1,841.96 U1.27
SPI2_MOSI: U1.28 U4.6 | length 646.3
  Top Layer w8: U4.6 200.31,1037.3 415.33,822.28 U1.28
SPI2_SCLK: U1.26 U4.4 | length 705.6
  Top Layer w8: v1(105,1265) 105,1290 140.31,1325.31 U4.4 ; v1(409.45,891.33) 439.13,861.65 U1.26
  Bottom Layer w8: v1(105,1265) 239.69,1130.31 239.69,1061.09 v1(409.45,891.33)
SWCLK: P2.3 U1.37 | length 533.8
  Top Layer w8: U1.37 551.18,570.08 888.98,232.28 P2.3
SWDIO: P2.2 U1.34 | length 723.7
  Top Layer w8: U1.34 v1(584.76,704.17)
  Bottom Layer w8: v1(584.76,704.17) 988.19,300.74 P2.2
USART1_RX: R11.1 U1.31 | length 96.4
  Top Layer w8: R11.1 434.41,763.22 U1.31
USART1_TX: R13.2 U1.30 | length 122.8
  Top Layer w8: R13.2 U1.30
VCC: C1.2 D3.1 Q1.2 R2.1 U2.4 U2.8 | length 470.7
  Top Layer w16: Q1.2 1294.58,604 v1(1294.58,545.48) C1.2 ; v1(1344.58,423.85) 1361.12,440.39 1400.84,440.39 U2.4 ; D3.1 v2(1484.58,333.85) R2.1
  Top Layer w20: U2.8 1682.61,591.85 v1(1689.58,584.87)
VCC_3V: C4.2 C5.1 C6.2 C7.2 C8.2 C9.2 C10.2 C11.1 C12.1 C13.1 C15.2 C16.1 C17.1 C18.2 C22.1 C23.2 C24.1 C25.2 R14.2 U1.1 U1.9 U1.24 U1.36 U1.48 U3.5 U4.1 U4.14 U5.4 U5.9 U5.11 U5.14 U5.15 U5.18 | length 2387.6
  Top Layer w8: U4.1 C15.2 C16.1 v1(168.33,1544.69) ; U4.14 C17.1 C18.2 v1(239.69,1544.69) ; v1(450,932.51) C12.1 U1.24 ; v1(464.13,543.38) C13.1 464.13,603.69 500,639.55 U1.36 ; C6.2 525.13,1299 541.31,1315.18 U5.18 ; v1(506,1469) C7.2 ; U5.15 600.45,1389 580.45,1409 526,1409 C5.1 C7.2 ; U5.14 641.94,1413.06 627.56,1427.44 C7.2 ; U5.4 681.31,1197.75 710.37,1168.69 C24.1 v1(731,1204) ; U5.11 701,1409 719.44,1427.44 774.75,1427.44 C22.1 v1(841,1453.69) ; U5.9 C23.2 806.31,1328.37 v1(845.68,1289) ; U1.48 787.4,593.93 C11.1 803.15,527.31 C10.2 ; v1(803.15,444.36) C10.2 ; U1.1 816.66,664.8 816.66,506.57 C10.2 ; U1.9 866.18,822.28 897.59,853.68 897.59,884.63 910.7,897.75 C9.2 930.63,899.72 944.41,913.5 C8.2 977.82,913.5 v1(1012.39,948.06)
  Top Layer w10: v1(476,1254) 506,1284 C6.2
  Top Layer w20: v2(961.45,1124) C25.2 ; v2(1355,817.92) C4.2 U3.5
  Bottom Layer w8: R14.2 v1(523,491.85)
VCC_5V: J2.1 P1.7 P1.8 | length 1941.1
  Top Layer w20: P1.8 P1.7 ; v2(810,386.56) v2(988.19,386.56) ; v2(1514,704.17) 1588.12,704.17 J2.1
  Bottom Layer w20: P1.8 70,443 210,303 541.44,303 625,386.56 v2(810,386.56) ; v2(988.19,386.56) 1305.79,704.17 v2(1514,704.17)
pads on no net: U1.2 U1.10 U1.11 U1.20 U1.29 U1.32 U1.33 U1.38 U1.39 U1.41 U1.42 U1.43 U1.45 U1.46 U3.4 U4.2 U4.15 YA1.2 YA1.4 YA2.2 YA2.4

## Polygon pours and split planes (outlines as drawn)
no net on Multi-Layer (solid): 0,2000
GND on Top Layer "Top Layer-GND" (solid, remove dead copper, pour order 4): 0,0 1889.76,0 1889.76,2125.87 1889.65,2125.98 0,2125.98
no net on Top Layer "Top Layer-No Net" (solid, pour order 2): 632.95,2360
GND on Bottom Layer "Bottom Layer-GND" (solid, remove dead copper, pour order 6): 0,0 1889.76,0 1889.76,2125.98 0,2125.98 0,0
GND on GND Plane (split plane): 172 vertices, not listed, extent 20.05,20.05 1869.72,2105.94
VCC_3V on POWER Plane (split plane): 162 vertices, not listed, extent 20.05,20.05 1869.72,2105.94
BAT+ on POWER Plane (split plane): 1505.48,969.9 1869.67,969.9 1869.67,50 1869.72,49.5 1869.39,45.31 1868.29,40.73 1866.49,36.38 1864.03,32.37 1860.97,28.79 1857.39,25.74 1853.38,23.28 1849.03,21.48 1844.46,20.38 1840.27,20.05 1839.76,20.1 1522.44,20.1 1521.94,20.05 1517.75,20.38 1513.17,21.48 1508.82,23.28 1504.81,25.74 1501.23,28.79 1498.18,32.37 1495.72,36.38 1493.92,40.73 1492.82,45.31 1492.49,49.5 1492.54,50 1492.54,186.22 1492.51,186.47 1492.19,193.09 1491.18,199.89 1489.51,206.56 1487.19,213.04 1484.25,219.26 1480.71,225.16 1476.62,230.68 1476.22,231.12 1488,231.12 1488.08,231.14 1494.17,231.48 1500.26,232.51 1506.19,234.23 1511.9,236.59 1517.31,239.58 1522.35,243.15 1526.95,247.27 1531.07,251.87 1534.64,256.91 1537.63,262.32 1540,268.03 1541.71,273.96 1542.74,280.05 1543.08,286.14 1543.1,286.22 1543.1,445.35 1543.03,445.7 1543.39,451.22 1544.54,456.99 1546.43,462.57 1549.03,467.84 1552.3,472.74 1556.18,477.16 1560.61,481.04 1565.5,484.31 1570.78,486.92 1576.35,488.81 1582.13,489.96 1587.64,490.32 1588,490.25 1679,490.25 1679.08,490.26 1685.17,490.61 1691.26,491.64 1697.19,493.35 1702.9,495.71 1708.31,498.7 1713.35,502.28 1717.95,506.39 1722.07,511 1725.64,516.04 1728.63,521.45 1731,527.15 1732.71,533.09 1733.74,539.18 1734.08,545.27 1734.1,545.35 1734.1,613.85 1734.08,613.93 1733.74,620.01 1732.71,626.1 1731,632.04 1728.63,637.75 1725.64,643.15 1722.07,648.19 1717.95,652.8 1713.35,656.91 1708.31,660.49 1702.9,663.48 1697.19,665.84 1691.26,667.55 1685.17,668.59 1679.08,668.93 1679,668.94 1460.58,668.94 1460.58,925 1460.51,925.36 1460.87,930.87 1462.02,936.65 1463.91,942.22 1466.51,947.5 1469.78,952.39 1473.66,956.82 1478.09,960.7 1482.98,963.97 1488.26,966.57 1493.83,968.46 1499.61,969.61 1505.12,969.97
VCC on POWER Plane (split plane): 1684.87,658.46 1690.65,657.31 1696.22,655.42 1701.5,652.81 1706.39,649.54 1710.82,645.66 1714.7,641.24 1717.97,636.34 1720.57,631.07 1722.46,625.49 1723.61,619.72 1723.97,614.2 1723.9,613.85 1723.9,545.35 1723.97,544.99 1723.61,539.47 1722.46,533.7 1720.57,528.13 1717.97,522.85 1714.7,517.95 1710.82,513.53 1706.39,509.65 1701.5,506.38 1696.22,503.78 1690.65,501.88 1684.87,500.73 1679.36,500.37 1679,500.44 1588,500.44 1587.92,500.43 1581.83,500.09 1575.74,499.05 1569.81,497.34 1564.1,494.98 1558.69,491.99 1553.65,488.41 1549.05,484.3 1544.93,479.69 1541.36,474.65 1538.37,469.25 1536,463.54 1534.29,457.6 1533.26,451.51 1532.92,445.43 1532.9,445.35 1532.9,286.22 1532.97,285.86 1532.61,280.35 1531.46,274.57 1529.57,269 1526.97,263.72 1523.7,258.83 1519.82,254.4 1515.39,250.52 1510.5,247.25 1505.22,244.65 1499.65,242.76 1493.87,241.61 1488.36,241.25 1488,241.32 1465.66,241.32 1461.38,244.49 1455.48,248.03 1449.26,250.97 1442.79,253.29 1436.11,254.96 1429.31,255.97 1422.69,256.29 1422.44,256.32 1252.36,256.32 1252.36,613.85 1252.29,614.2 1252.65,619.72 1253.8,625.49 1255.69,631.07 1258.29,636.34 1261.56,641.24 1265.44,645.66 1269.87,649.54 1274.76,652.81 1280.04,655.42 1285.61,657.31 1291.39,658.46 1296.9,658.82 1297.26,658.75 1679,658.75 1679.36,658.82

## Keep-outs
Keep-Out Layer:
  lines w10: 1840,2125.87 cw(c1839.88,2075.98) 1889.76,2075.87 1889.76,50 cw(c1839.76,50) 1839.76,0 1522.44,0 cw(c1522.44,50) 1472.44,50 1472.44,186.22 ccw(c1422.44,186.22) 1422.44,236.22 1158.27,236.22 ccw(c1158.27,186.22) 1108.27,186.22 cw(c1083.27,186.22) 1083.27,161.22 806.5,161.22 cw(c806.5,186.22) 781.5,186.22 ccw(c731.5,186.22) 731.5,236.22 467.32,236.22 ccw(c467.32,186.22) 417.32,186.22 417.32,50 cw(c367.32,50) 367.32,0 50,0 cw(c50,50) 0,50 0,2075.98 cw(c50,2075.98) 50,2125.98 1840,2125.98

## Other copper
POWER Plane (plane layer: these items are gaps in the copper):
  pour cut-out: 648,1327.86 648,1302.14 675,1302.14 675,1327.86
  pour cut-out: 1522.44,508.85 1496.72,508.85 1496.72,481.85 1522.44,481.85
  pour cut-out: 1522.44,551.85 1496.72,551.85 1496.72,524.85 1522.44,524.85
  lines w10: 1247.26,236.22 1247.26,613.85 cw(c1297.26,613.85) 1297.26,663.85 1434.16,663.85 1679,663.85 cw(c1679,613.85) 1729,613.85 1729,545.35 cw(c1679,545.35) 1679,495.35 1588,495.35 ccw(c1588,445.35) 1538,445.35 1538,286.22 cw(c1488,286.22) 1488,236.22 1422.44,236.22 ; 1455.48,663.85 1455.48,925 cw(c1505.48,925) 1505.48,975 1787.4,975 1889.76,975

## Silkscreen, mask and mechanical layers (free items; w line width, h text height)
Top Overlay:
  text "SOLAR" at 1114,1856 h26 r90
  text "RFID_CC1101 / 433MHz / Rev2.3 / 2021.8.24" at 1437,1789 h40
Bottom Overlay:
  text "BAT" at 1787.4,193.09 h26
Drill Drawing:
  lines w10: 450.79,0 450.79,196.85 765.75,196.85 765.75,0 1123.03,0 ; 1124.02,0.98 1124.02,196.85 1438.98,196.85 1438.98,0 ; 1124.02,195.87 cw(c1125,195.87) 1125,196.85 ; 1889.76,0 ccw(c1889.76,0) 1889.76,0 ; 1889.76,0 ccw(c1889.76,0) 1889.76,0 ; 1889.76,0 ccw(c1889.76,0) 1889.76,0

## Dimensions
0,0 to 1889.76,0 on Top Layer
-26,0 to 0,2125.98 on Top Layer

## Text inside footprints (layer, text, board x,y; h text height)
P1: Bottom Overlay "VCC" at 185,345 h26 r90; Bottom Overlay "RX1" at 312.89,676.41 h26 r90; Bottom Overlay "TX1" at 310,775.63 h26 r90; Bottom Overlay "GND" at 310,875.63 h26 r90; Bottom Overlay "VCC" at 86,345 h26 r90; Bottom Overlay "RX2" at 265,676.41 h26 r90; Bottom Overlay "TX2" at 265,775.63 h26 r90; Bottom Overlay "GND" at 265,875.63 h26 r90; Bottom Overlay "2" at 85,926.41 h26 r90; Bottom Overlay "1" at 190,921.41 h26 r90; Bottom Overlay "7" at 185,471.41 h26 r90; Bottom Overlay "8" at 85,471.41 h26 r90
P2: Top Overlay "VCC" at 1040,292 h26; Top Overlay "DM" at 966,292 h26; Top Overlay "DP" at 880,292 h26; Top Overlay "GND" at 781,291 h26